# Altium PCB door_connect.PcbDoc
Units mm, origin at the board's own origin, x right, y up, seen from the top; angles counter-clockwise.
Board outline 50 x 47.75 mm, 2 copper layers (Top Layer, Bottom Layer); 2 components, 7 nets, 28 pads, 0 vias.
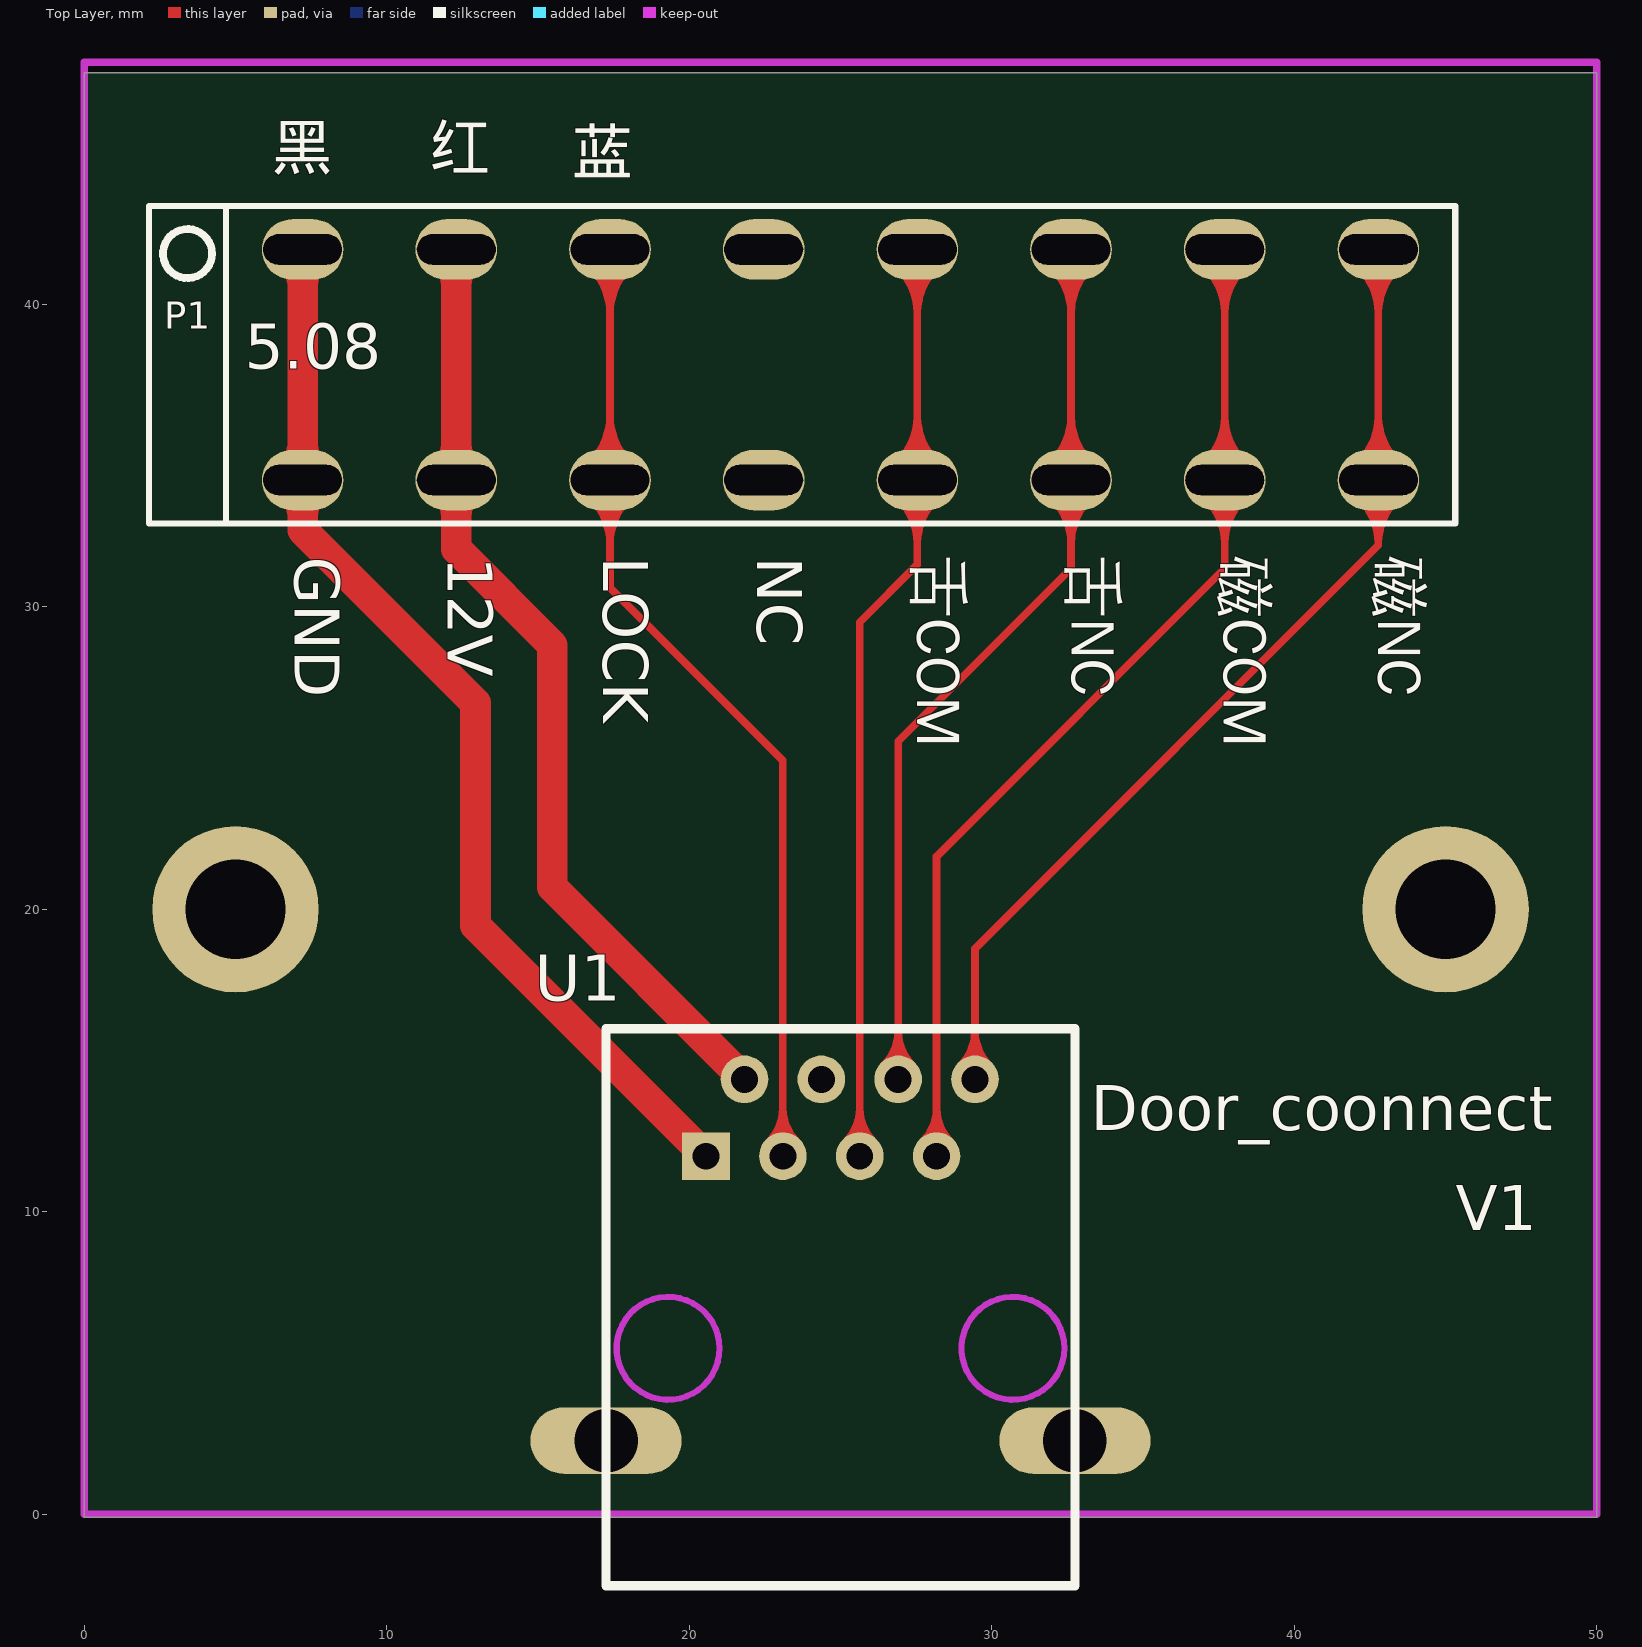
[diagram p0: Top Layer view]
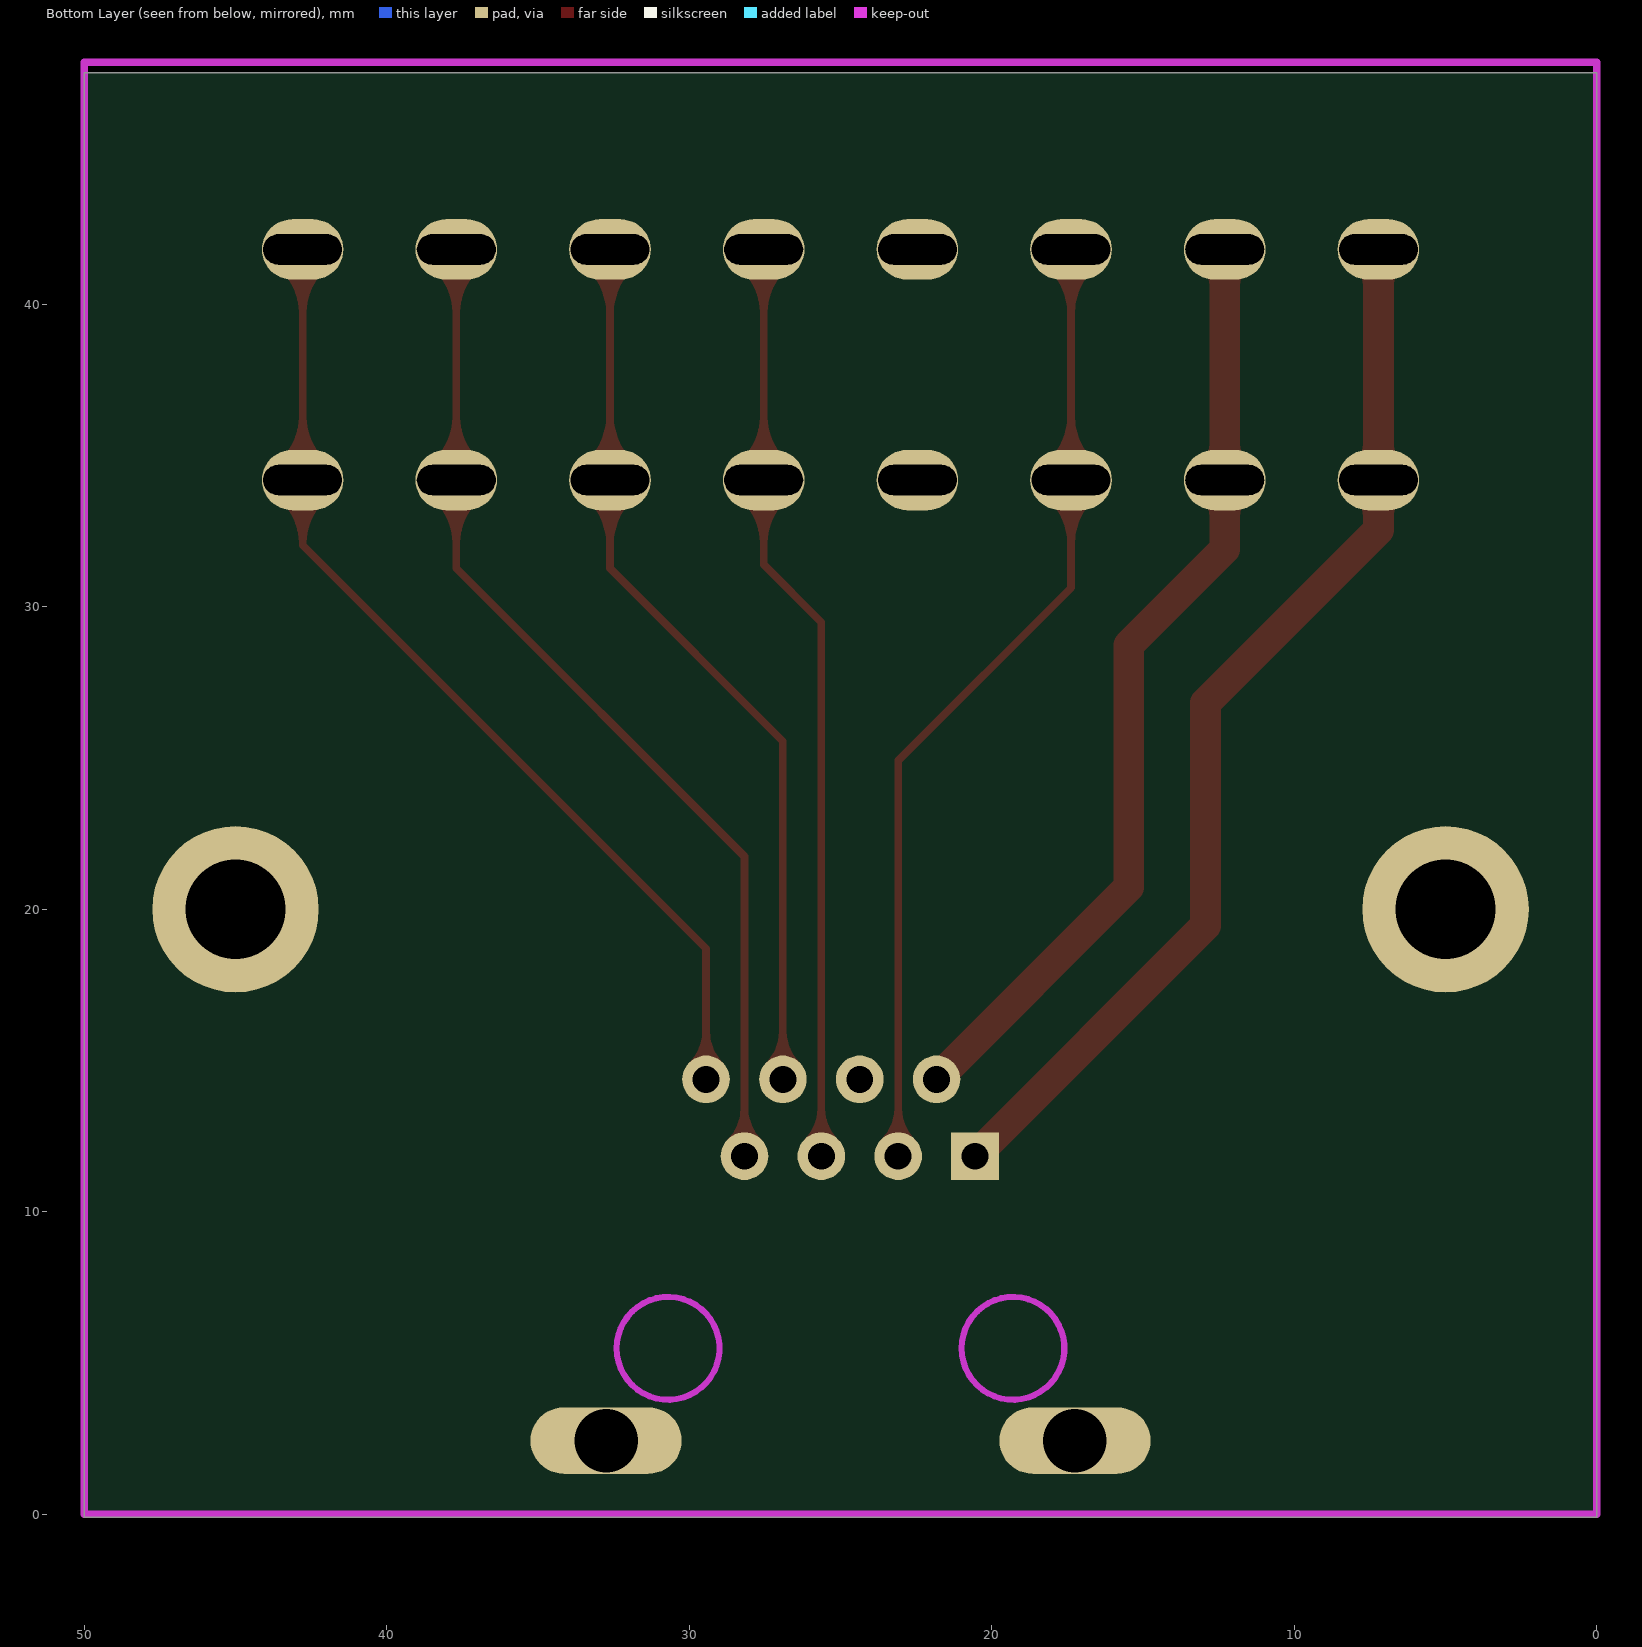
[diagram p1: Bottom Layer view, seen from below]

## Layer stack, top to bottom
Top Layer: signal copper 0.0356
Dielectric: dielectric 0.32, FR-4, Dk 4.8
Bottom Layer: signal copper 0.0356

## Board outline
0,-0.1 50,-0.1 50,47.652 0,47.652

## Design rules (kind name [scope] priority, off if disabled: settings)
Clearance [All] p1: gap=0.178
ComponentClearance [All] p1: gap=0 collisioncheckmode=3 verticalgap=0 showdistances=FALSE
HoleSize [All] p1: absolutevalues=TRUE maxlimit=25.4 minlimit=0.025 maxpercent=80.000 minpercent=20.000
HoleToHoleClearance [All] p1: gap=0.178 allowstackedmicrovias=TRUE
MinimumSolderMaskSliver [All] p1: minsoldermaskwidth=0
PolygonConnect [All] p1: connectstyle=Relief reliefconductorwidth=0.254 reliefentries=4 polygonreliefangle="90 Angle"
RoutingVias [All] p1: holewidth=0.356 width=0.559 viastyle="Through Hole" minholewidth=0.356 minwidth=0.559 maxholewidth=7.112 maxwidth=12.7
SilkToSilkClearance [All] p1: silktosilkclearance=0
SilkscreenOverComponentPads [All] p1: minsilkscreentomaskgap=0
SolderMaskExpansion [All] p1: expansion=0.102
TestPointUsage [All] p1: valid=0 allowmultiple=FALSE
Testpoint [All] p1: side=15 testpointundercomponent=TRUE minsize=1.016 maxsize=2.54 preferedsize=1.524 minholesize=0 maxholesize=1.016 preferedholesize=0.813 testpointgrid=0.025 style=1023 order=0-112345678
Width [All] p1: maxlimit=2.54 minlimit=0.178 preferedwidth=0.178
18 further rules are at their usual default settings.

## Components (designator, comment, footprint, x,y, rotation, side; value= is the part's Value field where it differs from the comment)
P1 "Header 8" KF142R-5.08-8 25,38 r0 top
U1 "RJ45-DTE" RJ45 25,5.488 r180 top

## Footprints (in the part's own frame and the unit in brackets; to place one, negate y for a bottom-side part, rotate by r counter-clockwise, add the part's x,y. Pads: shape width x height; smd on the part's side, far side on the other; paste and mask are expansions set on the pad)
KF142R-5.08-8 [mm]
  oval 2.7x2 hole 1 slot 2.6 at 0 deg: 1(-17.78,-3.81) 1(-17.78,3.81) 2(-12.7,-3.81) 2(-12.7,3.81) 3(-7.62,-3.81) 3(-7.62,3.81) 4(-2.54,-3.81) 4(-2.54,3.81) 5(2.54,-3.81) 5(2.54,3.81) 6(7.62,-3.81) 6(7.62,3.81) 7(12.7,-3.81) 7(12.7,3.81) 8(17.78,-3.81) 8(17.78,3.81)
  silkscreen extent -22.86,-5.25 20.32,5.25
RJ45 [mil]
  oval 196.85x86.61 hole 82.68: 0(-305.12,120.08) 0(305.12,120.08)
  rect 62x62 hole 35: 1(175,-250)
  round 62 hole 35: 2(125,-350) 3(75,-250) 4(25,-350) 5(-25,-250) 6(-75,-350) 7(-125,-250) 8(-175,-350)
  Keep-Out Layer circle w8: c-224.41,0 r66.93
  Keep-Out Layer circle w8: c224.41,0 r66.93
  silkscreen extent -305,-416 305,309

## Part data
P1: "Header, 8-Pin"

## Free pads (board coordinates)
  round 5.5 hole 3.3: 0(5,20) 0(45,20)

## Nets (pads, with @x,y where several pads share a name; then routed paths per layer and width w, separated by ;. In a path a pad name is that pad's centre, name@x,y a point inside that pad or via, vN(x,y) a via of type N, cw(c..) or ccw(c..) an arc to the next point about the centre after c; other vN are vias at no path point)
D12V: P1.2 U1.2 | length 37
  Top Layer w1.016: P1.2@11.952,33.842 cw(c11.112,33.002) 12.3,33.002 cw(c13.488,33.002) P1.2@12.648,33.842 ; P1.2@11.952,34.538 ccw(c11.112,35.378) 12.3,35.378 ccw(c13.488,35.378) P1.2@12.648,34.538 ; P1.2@11.952,41.462 cw(c11.112,40.622) 12.3,40.622 cw(c13.488,40.622) P1.2@12.648,41.462 ; P1.2@12.3,41.81 12.3,34.19 12.3,31.904 15.475,28.729 15.475,20.728 U1.2
FEED1_A: P1.5 U1.5 | length 51.8
  Top Layer w0.254: U1.5@25.168,12.305 ccw(c24.041,13.432) 25.635,13.432 ccw(c27.229,13.432) U1.5@26.102,12.305 ; U1.5@25.348,12.125 ccw(c24.654,12.819) 25.635,12.819 ccw(c26.616,12.819) U1.5@25.922,12.125 ; U1.5 25.635,29.491 27.54,31.396 27.54,34.19 P1.5@27.54,41.81 ; P1.5@26.923,33.573 cw(c25.432,32.082) 27.54,32.082 cw(c29.648,32.082) P1.5@28.157,33.573 ; P1.5@26.923,34.807 ccw(c25.432,36.298) 27.54,36.298 ccw(c29.648,36.298) P1.5@28.157,34.807 ; P1.5@26.923,41.193 cw(c25.432,39.702) 27.54,39.702 cw(c29.648,39.702) P1.5@28.157,41.193 ; P1.5@27.102,33.752 cw(c26.046,32.696) 27.54,32.696 cw(c29.034,32.696) P1.5@27.978,33.752 ; P1.5@27.102,34.628 ccw(c26.046,35.684) 27.54,35.684 ccw(c29.034,35.684) P1.5@27.978,34.628 ; P1.5@27.102,41.372 cw(c26.046,40.316) 27.54,40.316 cw(c29.034,40.316) P1.5@27.978,41.372
FEED1_B: P1.6 U1.6 | length 50.8
  Top Layer w0.254: U1.6@26.438,14.845 ccw(c25.311,15.972) 26.905,15.972 ccw(c28.499,15.972) U1.6@27.372,14.845 ; U1.6@26.618,14.665 ccw(c25.924,15.359) 26.905,15.359 ccw(c27.886,15.359) U1.6@27.192,14.665 ; U1.6 26.905,25.554 32.62,31.269 32.62,34.19 P1.6@32.62,41.81 ; P1.6@32.003,33.573 cw(c30.512,32.082) 32.62,32.082 cw(c34.728,32.082) P1.6@33.237,33.573 ; P1.6@32.003,34.807 ccw(c30.512,36.298) 32.62,36.298 ccw(c34.728,36.298) P1.6@33.237,34.807 ; P1.6@32.003,41.193 cw(c30.512,39.702) 32.62,39.702 cw(c34.728,39.702) P1.6@33.237,41.193 ; P1.6@32.182,33.752 cw(c31.126,32.696) 32.62,32.696 cw(c34.114,32.696) P1.6@33.058,33.752 ; P1.6@32.182,34.628 ccw(c31.126,35.684) 32.62,35.684 ccw(c34.114,35.684) P1.6@33.058,34.628 ; P1.6@32.182,41.372 cw(c31.126,40.316) 32.62,40.316 cw(c34.114,40.316) P1.6@33.058,41.372
FEED2_A: P1.7 U1.7 | length 54.9
  Top Layer w0.254: U1.7@27.708,12.305 ccw(c26.581,13.432) 28.175,13.432 ccw(c29.769,13.432) U1.7@28.642,12.305 ; U1.7@27.888,12.125 ccw(c27.194,12.819) 28.175,12.819 ccw(c29.156,12.819) U1.7@28.462,12.125 ; U1.7 28.175,21.744 37.7,31.269 37.7,34.19 P1.7@37.7,41.81 ; P1.7@37.083,33.573 cw(c35.592,32.082) 37.7,32.082 cw(c39.808,32.082) P1.7@38.317,33.573 ; P1.7@37.083,34.807 ccw(c35.592,36.298) 37.7,36.298 ccw(c39.808,36.298) P1.7@38.317,34.807 ; P1.7@37.083,41.193 cw(c35.592,39.702) 37.7,39.702 cw(c39.808,39.702) P1.7@38.317,41.193 ; P1.7@37.262,33.752 cw(c36.206,32.696) 37.7,32.696 cw(c39.194,32.696) P1.7@38.138,33.752 ; P1.7@37.262,34.628 ccw(c36.206,35.684) 37.7,35.684 ccw(c39.194,35.684) P1.7@38.138,34.628 ; P1.7@37.262,41.372 cw(c36.206,40.316) 37.7,40.316 cw(c39.194,40.316) P1.7@38.138,41.372
FEED2_B: P1.8 U1.8 | length 54
  Top Layer w0.254: U1.8@28.978,14.845 ccw(c27.851,15.972) 29.445,15.972 ccw(c31.039,15.972) U1.8@29.912,14.845 ; U1.8@29.158,14.665 ccw(c28.464,15.359) 29.445,15.359 ccw(c30.426,15.359) U1.8@29.732,14.665 ; U1.8 29.445,18.696 42.78,32.031 42.78,34.19 P1.8@42.78,41.81 ; P1.8@42.163,33.573 cw(c40.672,32.082) 42.78,32.082 cw(c44.888,32.082) P1.8@43.397,33.573 ; P1.8@42.163,34.807 ccw(c40.672,36.298) 42.78,36.298 ccw(c44.888,36.298) P1.8@43.397,34.807 ; P1.8@42.163,41.193 cw(c40.672,39.702) 42.78,39.702 cw(c44.888,39.702) P1.8@43.397,41.193 ; P1.8@42.342,33.752 cw(c41.286,32.696) 42.78,32.696 cw(c44.274,32.696) P1.8@43.218,33.752 ; P1.8@42.342,34.628 ccw(c41.286,35.684) 42.78,35.684 ccw(c44.274,35.684) P1.8@43.218,34.628 ; P1.8@42.342,41.372 cw(c41.286,40.316) 42.78,40.316 cw(c44.274,40.316) P1.8@43.218,41.372
GND: P1.1 U1.1 | length 41.1
  Top Layer w1.016: P1.1@6.872,33.842 cw(c6.032,33.002) 7.22,33.002 cw(c8.408,33.002) P1.1@7.568,33.842 ; P1.1@6.872,34.538 ccw(c6.032,35.378) 7.22,35.378 ccw(c8.408,35.378) P1.1@7.568,34.538 ; P1.1@6.872,41.462 cw(c6.032,40.622) 7.22,40.622 cw(c8.408,40.622) P1.1@7.568,41.462 ; P1.1@7.22,41.81 7.22,34.19 7.22,32.539 12.935,26.824 12.935,19.458 U1.1
LOCK_V+: P1.3 U1.3 | length 53.4
  Top Layer w0.254: P1.3@16.763,33.573 cw(c15.272,32.082) 17.38,32.082 cw(c19.488,32.082) P1.3@17.997,33.573 ; P1.3@16.763,34.807 ccw(c15.272,36.298) 17.38,36.298 ccw(c19.488,36.298) P1.3@17.997,34.807 ; P1.3@16.763,41.193 cw(c15.272,39.702) 17.38,39.702 cw(c19.488,39.702) P1.3@17.997,41.193 ; P1.3@16.942,33.752 cw(c15.886,32.696) 17.38,32.696 cw(c18.874,32.696) P1.3@17.818,33.752 ; P1.3@16.942,34.628 ccw(c15.886,35.684) 17.38,35.684 ccw(c18.874,35.684) P1.3@17.818,34.628 ; P1.3@16.942,41.372 cw(c15.886,40.316) 17.38,40.316 cw(c18.874,40.316) P1.3@17.818,41.372 ; P1.3@17.38,41.81 17.38,34.19 17.38,30.634 23.095,24.919 U1.3 ; U1.3@22.628,12.305 ccw(c21.501,13.432) 23.095,13.432 ccw(c24.689,13.432) U1.3@23.562,12.305 ; U1.3@22.808,12.125 ccw(c22.114,12.819) 23.095,12.819 ccw(c24.076,12.819) U1.3@23.382,12.125
pads on no net: P1.4 U1.0 U1.4

## Keep-outs
Keep-Out Layer:
  lines w0.254: 0,0 50,0 50,48 0,48 0,0

## Silkscreen, mask and mechanical layers (free items; w line width, h text height)
Top Overlay:
  text "黑" at 6.204,43.969 h2.54
  text "红" at 11.411,43.969 h2.54
  text "蓝" at 16.11,43.842 h2.54
  text "GND" at 6.458,31.652 h2.54 r270
  text "12V" at 11.528,31.652 h2.54 r270
  text "LOCK" at 16.654,31.652 h2.54 r270
  text "NC" at 21.751,31.652 h2.54 r270
  text "舌COM" at 27.042,31.65 h2.54 r270
  text "舌NC" at 32.14,31.65 h2.54 r270
  text "磁COM" at 37.174,31.65 h2.54 r270
  text "磁NC" at 42.272,31.65 h2.54 r270
  text "Door_coonnect" at 33.274,12.192 h2.54
  text "V1" at 45.339,8.89 h2.54

## Text inside footprints (layer, text, board x,y; h text height)
P1: Top Overlay "5.08" at 5.31,37.375 h2.54